# Altium PCB Chicken_Coop_Door_Main_Board_V3.PcbDoc (part 2 of 2)
Units mm, origin at the board's own origin, x right, y up, seen from the top; angles counter-clockwise.
Board outline 52.93 x 44.3 mm, 4 copper layers (Top Layer, Mid-Layer 1, Mid-Layer 2, Bottom Layer), stack 0.949 mm thick; 86 components, 66 nets, 267 pads, 85 vias.
Unrouted connection lines stored in the file: 4.
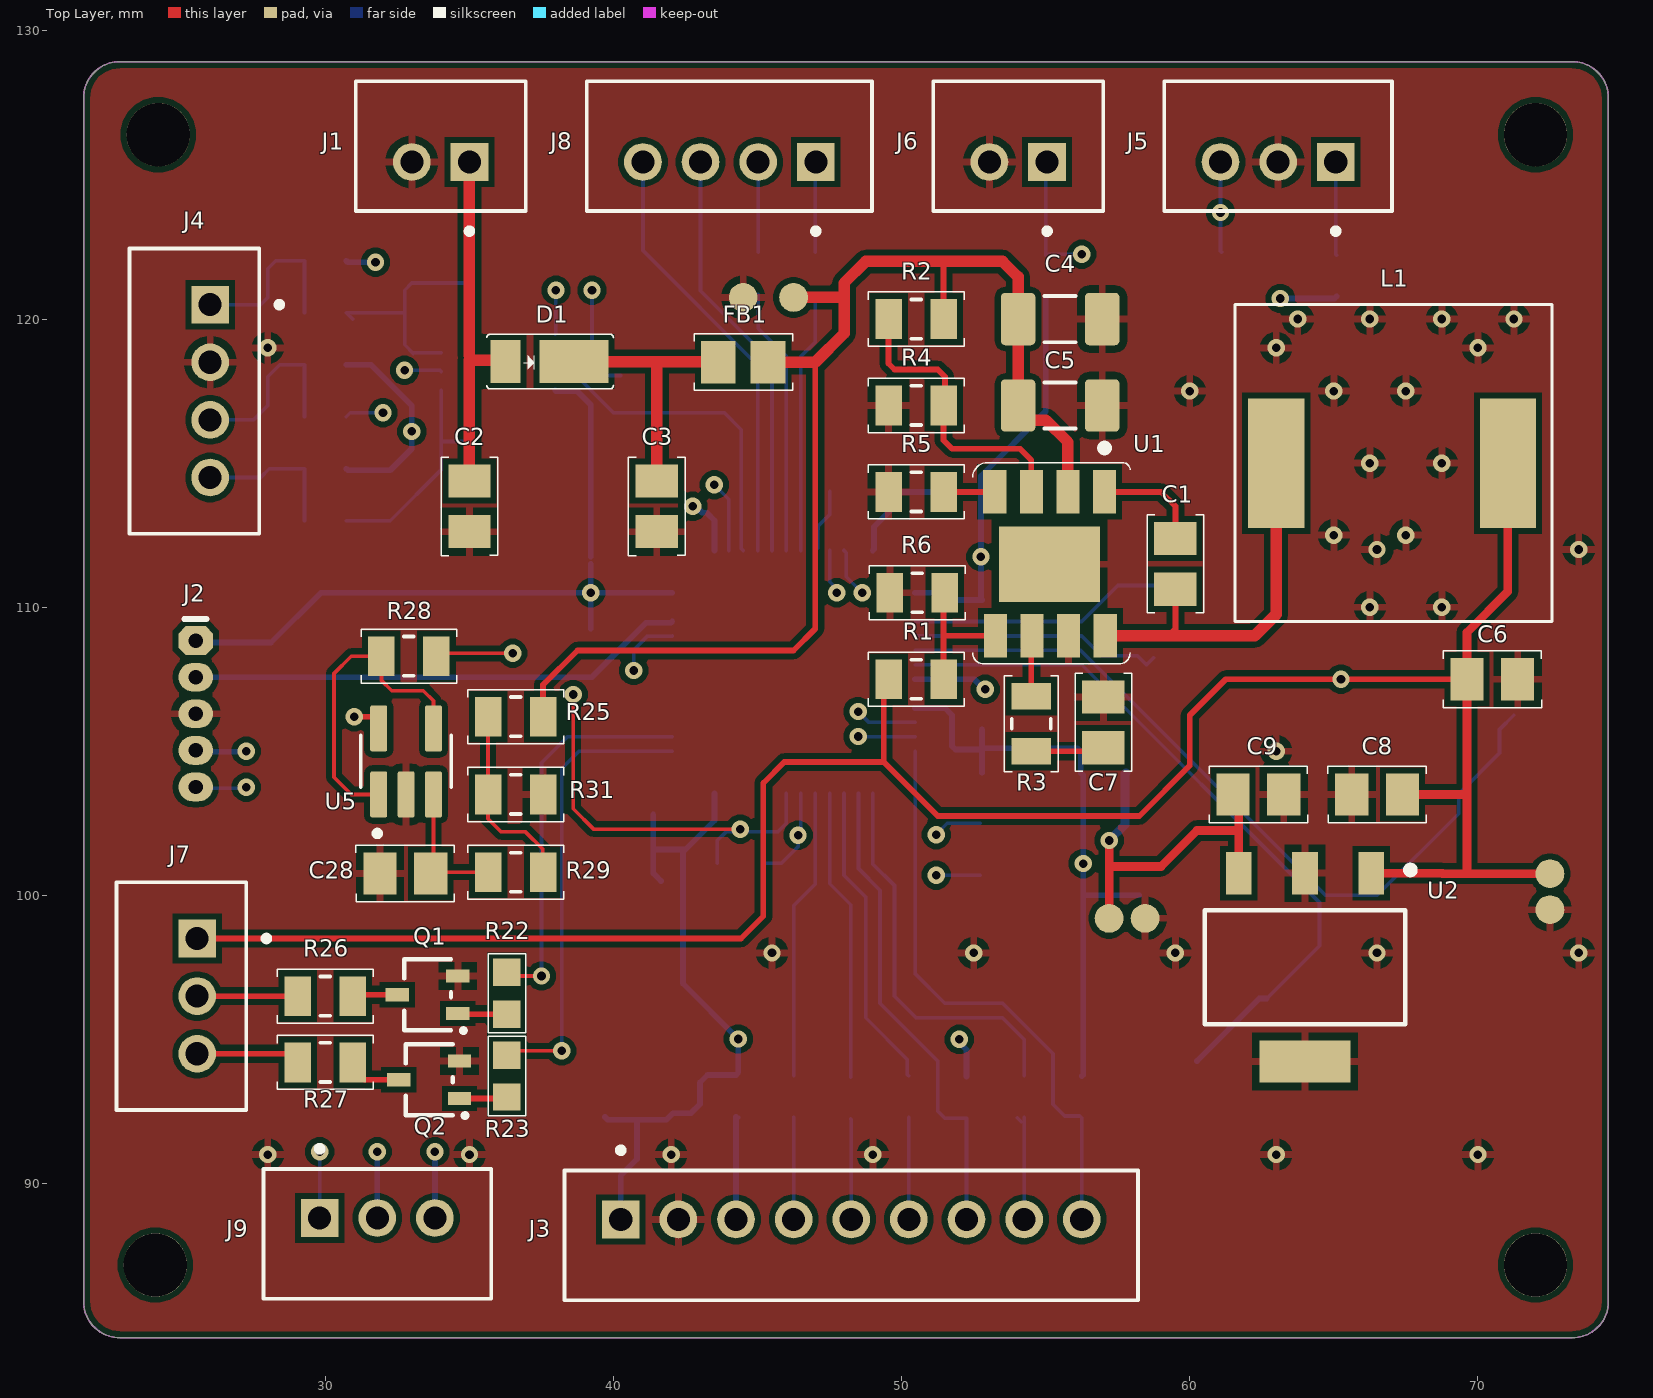
[diagram p0: Top Layer view]

## Polygon pours and split planes (outlines as drawn) (continued)
GND on Top Layer "GND_L01_P004" (solid, remove dead copper, pour order 4): 75,130 74.9,130.1 20.7,130.1 20.7,83.9 21.4,83.2 21.8,83.6 75.8,83.6 75.8,129.3 76.5,130

## Keep-outs
Keep-Out Layer:
  lines w0.05: 21.604,85.911 ccw(c22.874,85.911) 22.874,84.641 26.874,84.641 27.814,84.641 30.049,84.641 33.503,84.641 69.773,84.641 73.273,84.641 ccw(c73.273,85.899) 74.532,85.899 74.532,127.668 ccw(c73.262,127.668) 73.262,128.938 22.874,128.938 ccw(c22.874,127.668) 21.604,127.668 21.604,85.911

## Text inside footprints (layer, text, board x,y; h text height)
U3: Mechanical 13 "*" at 49.781,110.115 h1.27
U4: Mechanical 13 "*" at 35.25,115.25 h1.27 r180